# EAGLE board CT_schematic (EAGLE 7.6.0)

Size 100 x 80 mm. Coordinates in mm from the lower left corner, seen from the top.
Outline: 0,0 100,0 100,80 0,80 0,0
Copper layers (1*16): Top 0.035mm / dielectric 1.5mm / Bottom 0.035mm
Design rules "default": minimum track width 10mil, minimum drill 24mil, track to track 8mil, track to pad 8mil, pad to pad 8mil, via to via 8mil, smd to smd 8mil, copper to edge 40mil, drill to drill 8mil, minimum pad ring 10mil, minimum via ring 8mil, stop-mask expansion 4mil, vias tented up to drill 0mil, thermal gap 10mil

## Footprints (pad centres in the part's own frame; a part is rotated, then mirrored left to right if it is on the bottom)
C0603 = smd 0.8 x 0.8: 1 -0.762,0; 2 0.762,0
C0402 = smd 0.5 x 0.5: 1 -0.508,0; 2 0.508,0
C1210 = smd 1.2 x 2.5: 1 -1.524,0; 2 1.524,0
C0805 = smd 1.2 x 1.3: 1 -1.016,0; 2 1.016,0
R0603 = smd 0.8 x 0.8: 1 -0.762,0; 2 0.762,0
EXV-9H = smd 3.505 x 1.676: 1 -2.857,0; 2 2.857,0
L0603 = smd 0.8 x 0.8: 1 -0.762,0; 2 0.762,0
IND25X25CZ = smd 2.489 x 3.429: 1 -2.718,0; 2 2.718,0
PJ-037B_PACKAGE = drill 3.7 square: 1 12,0 | drill 3.2 square: 2 6,0
LQFP144 = smd 0.35 x 1.35: 1 -8.75,-10.625; 2 -8.25,-10.625; 3 -7.75,-10.625; 4 -7.25,-10.625; 5 -6.75,-10.625; 6 -6.25,-10.625; 7 -5.75,-10.625; 8 -5.25,-10.625; 9 -4.75,-10.625; 10 -4.25,-10.625; 11 -3.75,-10.625; 12 -3.25,-10.625; 13 -2.75,-10.62; 14 -2.25,-10.625; 15 -1.75,-10.625; 16 -1.25,-10.625; 17 -0.75,-10.625; 18 -0.25,-10.625; 19 0.25,-10.625; 20 0.75,-10.625; 21 1.25,-10.625; 22 1.75,-10.625; 23 2.25,-10.625; 24 2.75,-10.62; 25 3.25,-10.625; 26 3.75,-10.625; 27 4.25,-10.625; 28 4.75,-10.625; 29 5.25,-10.625; 30 5.75,-10.625; 31 6.25,-10.625; 32 6.75,-10.625; 33 7.25,-10.625; 34 7.75,-10.625; 35 8.25,-10.625; 36 8.75,-10.625; 73 8.75,10.625; 74 8.25,10.625; 75 7.75,10.625; 76 7.25,10.625; 77 6.75,10.625; 78 6.25,10.625; 79 5.75,10.625; 80 5.25,10.625; 81 4.75,10.625; 82 4.25,10.625; 83 3.75,10.625; 84 3.25,10.625; 85 2.75,10.625; 86 2.25,10.625; 87 1.75,10.625; 88 1.25,10.625; 89 0.75,10.625; 90 0.25,10.625; 91 -0.25,10.625; 92 -0.75,10.625; 93 -1.25,10.625; 94 -1.75,10.625; 95 -2.25,10.625; 96 -2.75,10.625; 97 -3.25,10.625; 98 -3.75,10.625; 99 -4.25,10.625; 100 -4.75,10.625; 101 -5.25,10.625; 102 -5.75,10.625; 103 -6.25,10.625; 104 -6.75,10.625; 105 -7.25,10.625; 106 -7.75,10.625; 107 -8.25,10.625; 108 -8.75,10.625 | smd 1.35 x 0.35: 37 10.625,-8.75; 38 10.625,-8.25; 39 10.625,-7.75; 40 10.625,-7.25; 41 10.625,-6.75; 42 10.625,-6.25; 43 10.625,-5.75; 44 10.625,-5.25; 45 10.625,-4.75; 46 10.625,-4.25; 47 10.625,-3.75; 48 10.625,-3.25; 49 10.625,-2.75; 50 10.625,-2.25; 51 10.625,-1.75; 52 10.625,-1.25; 53 10.625,-0.75; 54 10.625,-0.25; 55 10.625,0.25; 56 10.625,0.75; 57 10.625,1.25; 58 10.625,1.75; 59 10.625,2.25; 60 10.625,2.75; 61 10.625,3.25; 62 10.625,3.75; 63 10.625,4.25; 64 10.625,4.75; 65 10.625,5.25; 66 10.625,5.75; 67 10.625,6.25; 68 10.625,6.75; 69 10.625,7.25; 70 10.625,7.75; 71 10.625,8.25; 72 10.625,8.75; 109 -10.625,8.75; 110 -10.625,8.25; 111 -10.625,7.75; 112 -10.625,7.25; 113 -10.625,6.75; 114 -10.625,6.25; 115 -10.625,5.75; 116 -10.625,5.25; 117 -10.625,4.75; 118 -10.625,4.25; 119 -10.625,3.75; 120 -10.625,3.25; 121 -10.625,2.75; 122 -10.625,2.25; 123 -10.625,1.75; 124 -10.625,1.25; 125 -10.625,0.75; 126 -10.625,0.25; 127 -10.625,-0.25; 128 -10.625,-0.75; 129 -10.625,-1.25; 130 -10.625,-1.75; 131 -10.625,-2.25; 132 -10.625,-2.75; 133 -10.625,-3.25; 134 -10.625,-3.75; 135 -10.625,-4.25; 136 -10.625,-4.75; 137 -10.625,-5.25; 138 -10.625,-5.75; 139 -10.625,-6.25; 140 -10.625,-6.75; 141 -10.625,-7.25; 142 -10.625,-7.75; 143 -10.625,-8.25; 144 -10.625,-8.75
SOT-23-6 = smd 1.1 x 0.6: 1 -1.4,0.95; 2 -1.4,0; 3 -1.4,-0.95; 4 1.4,-0.95; 5 1.4,0; 6 1.4,0.95
AT24C02D = smd 1.6 x 0.6: 1 -2.475,1.905 | smd 1.55 x 0.6: 2 -2.475,0.635; 3 -2.475,-0.635; 4 -2.475,-1.905; 5 2.475,-1.905; 6 2.475,-0.635; 7 2.475,0.635; 8 2.475,1.905
TFBGA-153 = smd 0.3 x 0.3: A1 -3.25,3.25; A2 -2.75,3.25; A3 -2.25,3.25; A4 -1.75,3.25; A5 -1.25,3.25; A6 -0.75,3.25; A7 -0.25,3.25; A8 0.25,3.25; A9 0.75,3.25; A10 1.25,3.25; A11 1.75,3.25; A12 2.25,3.25; A13 2.75,3.25; A14 3.25,3.25; B1 -3.25,2.75; B2 -2.75,2.75; B3 -2.25,2.75; B4 -1.75,2.75; B5 -1.25,2.75; B6 -0.75,2.75; B7 -0.25,2.75; B8 0.25,2.75; B9 0.75,2.75; B10 1.25,2.75; B11 1.75,2.75; B12 2.25,2.75; B13 2.75,2.75; B14 3.25,2.75; C1 -3.25,2.25; C2 -2.75,2.25; C3 -2.25,2.25; C4 -1.75,2.25; C5 -1.25,2.25; C6 -0.75,2.25; C7 -0.25,2.25; C8 0.25,2.25; C9 0.75,2.25; C10 1.25,2.25; C11 1.75,2.25; C12 2.25,2.25; C13 2.75,2.25; C14 3.25,2.25; D1 -3.25,1.75; D2 -2.75,1.75; D3 -2.25,1.75; D4 -1.75,1.75; D12 2.25,1.75; D13 2.75,1.75; D14 3.25,1.75; E1 -3.25,1.25; E2 -2.75,1.25; E3 -2.25,1.25; E5 -1.25,1.25; E6 -0.75,1.25; E7 -0.25,1.25; E8 0.25,1.25; E9 0.75,1.25; E10 1.25,1.25; E12 2.25,1.25; E13 2.75,1.25; E14 3.25,1.25; F1 -3.25,0.75; F2 -2.75,0.75; F3 -2.25,0.75; F5 -1.25,0.75; F10 1.25,0.75; F12 2.25,0.75; F13 2.75,0.75; F14 3.25,0.75; G1 -3.25,0.25; G2 -2.75,0.25; G3 -2.25,0.25; G5 -1.25,0.25; G10 1.25,0.25; G12 2.25,0.25; G13 2.75,0.25; G14 3.25,0.25; H1 -3.25,-0.25; H2 -2.75,-0.25; H3 -2.25,-0.25; H5 -1.25,-0.25; H10 1.25,-0.25; H12 2.25,-0.25; H13 2.75,-0.25; H14 3.25,-0.25; J1 -3.25,-0.75; J2 -2.75,-0.75; J3 -2.25,-0.75; J5 -1.25,-0.75; J10 1.25,-0.75; J12 2.25,-0.75; J13 2.75,-0.75; J14 3.25,-0.75; K1 -3.25,-1.25; K2 -2.75,-1.25; K3 -2.25,-1.25; K5 -1.25,-1.25; K6 -0.75,-1.25; K7 -0.25,-1.25; K8 0.25,-1.25; K9 0.75,-1.25; K10 1.25,-1.25; K12 2.25,-1.25; K13 2.75,-1.25; K14 3.25,-1.25; L1 -3.25,-1.75; L2 -2.75,-1.75; L3 -2.25,-1.75; L12 2.25,-1.75; L13 2.75,-1.75; L14 3.25,-1.75; M1 -3.25,-2.25; M2 -2.75,-2.25; M3 -2.25,-2.25; M4 -1.75,-2.25; M5 -1.25,-2.25; M6 -0.75,-2.25; M7 -0.25,-2.25; M8 0.25,-2.25; M9 0.75,-2.25; M10 1.25,-2.25; M11 1.75,-2.25; M12 2.25,-2.25; M13 2.75,-2.25; M14 3.25,-2.25; N1 -3.25,-2.75; N2 -2.75,-2.75; N3 -2.25,-2.75; N4 -1.75,-2.75; N5 -1.25,-2.75; N6 -0.75,-2.75; N7 -0.25,-2.75; N8 0.25,-2.75; N9 0.75,-2.75; N10 1.25,-2.75; N11 1.75,-2.75; N12 2.25,-2.75; N13 2.75,-2.75; N14 3.25,-2.75; P1 -3.25,-3.25; P2 -2.75,-3.25; P3 -2.25,-3.25; P4 -1.75,-3.25; P5 -1.25,-3.25; P6 -0.75,-3.25; P7 -0.25,-3.25; P8 0.25,-3.25; P9 0.75,-3.25; P10 1.25,-3.25; P11 1.75,-3.25; P12 2.25,-3.25; P13 2.75,-3.25; P14 3.25,-3.25
RHB32_3P45X3P45 = smd 0.85 x 0.28: 1 -2.475,1.75; 2 -2.475,1.25; 3 -2.475,0.75; 4 -2.475,0.25; 5 -2.475,-0.25; 6 -2.475,-0.75; 7 -2.475,-1.25; 8 -2.475,-1.75; 17 2.475,-1.75; 18 2.475,-1.25; 19 2.475,-0.75; 20 2.475,-0.25; 21 2.475,0.25; 22 2.475,0.75; 23 2.475,1.25; 24 2.475,1.75 | smd 0.28 x 0.85: 9 -1.75,-2.475; 10 -1.25,-2.475; 11 -0.75,-2.475; 12 -0.25,-2.475; 13 0.25,-2.475; 14 0.75,-2.475; 15 1.25,-2.475; 16 1.75,-2.475; 25 1.75,2.475; 26 1.25,2.475; 27 0.75,2.475; 28 0.25,2.475; 29 -0.25,2.475; 30 -0.75,2.475; 31 -1.25,2.475; 32 -1.75,2.475 | smd 3.45 x 3.45: 33 0,0
MICRO_USB_AB = smd 0.4 x 1.35: 1 1.3,0.26; 2 0.65,0.26; 3 0,0.26; 4 -0.65,0.26; 5 -1.3,0.26 | drill 0.6 pad 0.95 long: 6 4.175,-2.54; 7 -4.175,-2.54 | drill 0.7 pad 1.1 long: 8 -2.225,0.46; 9 2.225,0.46
SOT143B = smd 1 x 0.7: 1 -0.75,-1 | smd 0.6 x 0.7: 2 0.95,-1; 3 0.95,1; 4 -0.95,1
USB-A-H = drill 0.914: 1 2.718,3.493; 2 2.718,1.003; 3 2.718,-1.003; 4 2.718,-3.493 | drill 2.311: 5 0,-6.566; 6 0,6.566
QFN-28 = smd 0.813 x 0.305: 1 -2.451,1.5; 2 -2.451,1; 3 -2.451,0.5; 4 -2.451,0; 5 -2.451,-0.5; 6 -2.451,-1; 7 -2.451,-1.5; 15 2.451,-1.5; 16 2.451,-1; 17 2.451,-0.5; 18 2.451,0; 19 2.451,0.5; 20 2.451,1; 21 2.451,1.5 | smd 0.305 x 0.813: 8 -1.5,-2.451; 9 -1,-2.451; 10 -0.5,-2.451; 11 0,-2.451; 12 0.5,-2.451; 13 1,-2.451; 14 1.5,-2.451; 22 1.5,2.451; 23 1,2.451; 24 0.5,2.451; 25 0,2.451; 26 -0.5,2.451; 27 -1,2.451; 28 -1.5,2.451 | smd 3.607 x 3.607: 29 0,0
SJ-43515TS-SMT-TR = smd 2.2 x 3: 1 0.6,-7.4; 4 3.4,-7.4 | smd 3 x 3: 2 12.8,-7.4; 5 17,-3 | smd 2 x 3: 3 5.3,0; 6 2.5,0 | drill 1.8: P$7 4.5,-3.69; P$8 11.54,-3.69
ABLS-12.288MHZ-B4-T = smd 5.6 x 2.8: 1 -3.81,0; 2 5.69,0
ASEK = smd 1.4 x 1: 1 -1.1,-0.8; 2 1.1,-0.8; 3 1.1,0.8; 4 -1.1,0.8
ASFL1 = smd 1.7 x 1.5: 1 -1.27,-1.1; 2 1.27,-1.1; 3 1.27,1.1; 4 -1.27,1.1
WSON-8 = smd 0.3 x 0.6: 1 -0.75,0; 2 0.05,0; 3 0.85,0; 4 1.65,0; 5 1.65,3.8; 6 0.85,3.8; 7 0.05,3.8; 8 -0.75,3.8 | smd 3 x 2.6: PAD 0.45,1.9
IR3899MTR1PBF = smd 0.25 x 0.75: 1 0,0; 2 0.5,0; 3 1,0; 4 1.5,0; 5 2,0; 6 2.5,0; 7 3,0 | smd 0.75 x 0.25: 8 3.425,0.78; 9 3.425,1.28; 10 3.425,1.78; 14 -0.425,1.78; 15 -0.425,1.28; 16 -0.425,0.78 | smd 0.3 x 1.95: 11 3.22,3.63 | smd 1.62 x 2.42: 12 1.786,3.8 | smd 1 x 1.95: 13 0.117,3.63 | smd 2.19 x 1.25: 17 1.51,1.26
SON-6 = smd 0.55 x 0.3: 1 -0.355,0.5 | smd 0.52 x 0.3: 2 -0.37,0; 3 -0.37,-0.5; 4 0.37,-0.5; 5 0.37,0; 6 0.37,0.5
SW_4-1437565-2 = smd 1.4 x 2.1: 1 -2.23,4.55; 2 -2.23,-4.55; 3 2.23,4.55; 4 2.23,-4.55
LGM67K-G1J2-24-Z = smd 0.8 x 1.4: A -2,0; C 0,0
NC7SZ125M5X = smd 1.3 x 0.7: 1 -1.3,0.95; 2 -1.3,0; 3 -1.3,-0.95; 4 1.3,-0.95; 5 1.3,0.95
DUMMY_PACKAGE_331 = drill 0.3: 1 0,-1; 2 1.5,-1; 3 3,-1

## Placement (x,y rotation side)
C1  1e-06  [C0603]  -88.9,85.09 0 top  (outside the outline)
C2  1e-07  [C0603]  -92.71,85.09 0 top  (outside the outline)
C3  1e-07  [C0603]  -15.24,90.17 0 top  (outside the outline)
C4  1e-07  [C0603]  -19.05,90.17 0 top  (outside the outline)
C5  1e-07  [C0603]  -22.86,90.17 0 top  (outside the outline)
C6  1e-07  [C0603]  -26.67,90.17 0 top  (outside the outline)
C7  1e-07  [C0603]  -30.48,90.17 0 top  (outside the outline)
C8  1e-07  [C0603]  -34.29,90.17 0 top  (outside the outline)
C9  1e-07  [C0603]  -38.1,90.17 0 top  (outside the outline)
C10  1e-07  [C0603]  -41.91,90.17 0 top  (outside the outline)
C11  1e-07  [C0603]  -45.72,90.17 0 top  (outside the outline)
C12  1e-07  [C0603]  -49.53,90.17 0 top  (outside the outline)
C13  1e-07  [C0603]  -53.34,90.17 0 top  (outside the outline)
C14  4.7e-06  [C0603]  -54.61,85.09 0 top  (outside the outline)
C15  2.2e-06  [C0603]  -58.42,85.09 0 top  (outside the outline)
C16  2.2e-06  [C0603]  -62.23,85.09 0 top  (outside the outline)
C17  1e-08  [C0603]  -57.15,90.17 0 top  (outside the outline)
C18  1e-06  [C0603]  -60.96,90.17 0 top  (outside the outline)
C19  1e-07  [C0603]  -64.77,90.17 0 top  (outside the outline)
C20  1e-08  [C0402]  -62.23,95.25 0 top  (outside the outline)
C21  1e-07  [C0402]  -66.04,95.25 0 top  (outside the outline)
C22  2.2e-06  [C0603]  -66.04,85.09 0 top  (outside the outline)
C23  2.2e-06  [C0603]  -69.85,85.09 0 top  (outside the outline)
C24  1e-07  [C0402]  -69.85,95.25 0 top  (outside the outline)
C25  1e-07  [C0402]  -73.66,95.25 0 top  (outside the outline)
C26  2.2e-06  [C0603]  -73.66,85.09 0 top  (outside the outline)
C27  1e-07  [C0402]  -77.47,95.25 0 top  (outside the outline)
C28  2.2e-06  [C0603]  -77.47,85.09 0 top  (outside the outline)
C29  1e-07  [C0402]  -81.28,95.25 0 top  (outside the outline)
C30  1e-07  [C0402]  -85.09,95.25 0 top  (outside the outline)
C31  2.2e-06  [C0603]  -81.28,85.09 0 top  (outside the outline)
C32  1e-06  [C0603]  -68.58,90.17 0 top  (outside the outline)
C33  2.2e-05  [C1210]  -73.66,60.96 0 top  (outside the outline)
C34  2.2e-05  [C1210]  -80.01,60.96 0 top  (outside the outline)
C35  1e-09  [C0402]  -88.9,95.25 0 top  (outside the outline)
C36  1e-09  [C0402]  -92.71,95.25 0 top  (outside the outline)
C37  1e-07  [C0402]  -15.24,100.33 0 top  (outside the outline)
C38  1e-07  [C0402]  -19.05,100.33 0 top  (outside the outline)
C39  1e-07  [C0402]  -22.86,100.33 0 top  (outside the outline)
C40  1e-07  [C0402]  -26.67,100.33 0 top  (outside the outline)
C41  1e-07  [C0402]  -30.48,100.33 0 top  (outside the outline)
C42  1e-05  [C0805]  -50.8,68.58 0 top  (outside the outline)
C43  1e-05  [C0805]  -55.88,68.58 0 top  (outside the outline)
C44  1e-05  [C0805]  -60.96,68.58 0 top  (outside the outline)
C45  1e-05  [C0805]  -66.04,68.58 0 top  (outside the outline)
C46  1e-05  [C0805]  -71.12,68.58 0 top  (outside the outline)
C47  2.2e-11  [C0402]  -54.61,95.25 0 top  (outside the outline)
C48  2.2e-11  [C0402]  -58.42,95.25 0 top  (outside the outline)
C49  1e-08  [C0402]  -34.29,100.33 0 top  (outside the outline)
C50  1e-08  [C0402]  -38.1,100.33 0 top  (outside the outline)
C51  1e-08  [C0402]  -41.91,100.33 0 top  (outside the outline)
C52  1e-08  [C0402]  -45.72,100.33 0 top  (outside the outline)
C53  1e-05  [C1210]  -86.36,60.96 0 top  (outside the outline)
C54  1e-05  [C0805]  -76.2,68.58 0 top  (outside the outline)
C55  8e-07  [R0603]  -72.39,90.17 0 top  (outside the outline)
C56  1e-05  [C1210]  -92.71,60.96 0 top  (outside the outline)
C57  0.0001  [C1210]  -16.51,69.85 0 top  (outside the outline)
C58  2.2e-06  [C0603]  -85.09,85.09 0 top  (outside the outline)
C59  1e-07  [C0402]  -49.53,100.33 0 top  (outside the outline)
C60  1e-07  [C0402]  -53.34,100.33 0 top  (outside the outline)
C61  6.9430689229727e-09  [R0603]  -86.36,68.58 0 top  (outside the outline)
C62  2.3669553146498e-07  [R0603]  -20.32,74.93 0 top  (outside the outline)
C65  1e-07  [C0402]  -57.15,100.33 0 top  (outside the outline)
C66  0.0001  [EXV-9H]  -73.66,52.07 0 top  (outside the outline)
C67  0.0001  [EXV-9H]  -85.09,52.07 0 top  (outside the outline)
C68  1e-08  [C0402]  -60.96,100.33 0 top  (outside the outline)
C69  1e-08  [C0402]  -64.77,100.33 0 top  (outside the outline)
C70  1e-08  [C0402]  -68.58,100.33 0 top  (outside the outline)
F1  240.0  [L0603]  -76.2,90.17 0 top  (outside the outline)
I1  6.8e-07  [IND25X25CZ]  -36.83,62.23 0 top  (outside the outline)
J1  PJ-037B  [PJ-037B_PACKAGE]  -55.88,30.48 0 top  (outside the outline)
R2  1000.0  [R0603]  -80.01,90.17 0 top  (outside the outline)
R4  4700.0  [R0603]  -83.82,90.17 0 top  (outside the outline)
R5  4700.0  [R0603]  -87.63,90.17 0 top  (outside the outline)
R6  4700.0  [R0603]  -91.44,90.17 0 top  (outside the outline)
R7  2200.0  [R0603]  -95.25,90.17 0 top  (outside the outline)
R8  2200.0  [R0603]  -15.24,95.25 0 top  (outside the outline)
R9  47000.0  [R0603]  -63.5,74.93 0 top  (outside the outline)
R10  10000.0  [R0603]  -68.58,74.93 0 top  (outside the outline)
R11  10000.0  [R0603]  -73.66,74.93 0 top  (outside the outline)
R12  10000.0  [R0603]  -78.74,74.93 0 top  (outside the outline)
R13  1270.0  [R0603]  -19.05,95.25 0 top  (outside the outline)
R14  10000.0  [R0603]  -83.82,74.93 0 top  (outside the outline)
R15  10000.0  [R0603]  -88.9,74.93 0 top  (outside the outline)
R16  10000.0  [R0603]  -93.98,74.93 0 top  (outside the outline)
R17  10000.0  [R0603]  -15.24,80.01 0 top  (outside the outline)
R18  10000.0  [R0603]  -20.32,80.01 0 top  (outside the outline)
R19  10000.0  [R0603]  -25.4,80.01 0 top  (outside the outline)
R20  34000.0  [R0603]  -30.48,80.01 0 top  (outside the outline)
R21  34000.0  [R0603]  -35.56,80.01 0 top  (outside the outline)
R22  34000.0  [R0603]  -40.64,80.01 0 top  (outside the outline)
R23  34000.0  [R0603]  -45.72,80.01 0 top  (outside the outline)
R24  34000.0  [R0603]  -50.8,80.01 0 top  (outside the outline)
R25  34000.0  [R0603]  -55.88,80.01 0 top  (outside the outline)
R26  34000.0  [R0603]  -60.96,80.01 0 top  (outside the outline)
R27  34000.0  [R0603]  -66.04,80.01 0 top  (outside the outline)
R28  34000.0  [R0603]  -71.12,80.01 0 top  (outside the outline)
R29  34000.0  [R0603]  -76.2,80.01 0 top  (outside the outline)
R30  47000.0  [R0603]  -81.28,80.01 0 top  (outside the outline)
R31  10000.0  [R0603]  -86.36,80.01 0 top  (outside the outline)
R32  10000.0  [R0603]  -91.44,80.01 0 top  (outside the outline)
R33  47000.0  [R0603]  -15.24,85.09 0 top  (outside the outline)
R34  47000.0  [R0603]  -20.32,85.09 0 top  (outside the outline)
R35  47000.0  [R0603]  -25.4,85.09 0 top  (outside the outline)
R36  680.0  [R0603]  -22.86,95.25 0 top  (outside the outline)
R37  100000.0  [R0603]  -38.1,74.93 0 top  (outside the outline)
R38  806.0  [R0603]  -26.67,95.25 0 top  (outside the outline)
R39  1000.0  [R0603]  -30.48,95.25 0 top  (outside the outline)
R40  100000.0  [R0603]  -43.18,74.93 0 top  (outside the outline)
R41  153694.38  [R0603]  -33.02,74.93 0 top  (outside the outline)
R42  100000.0  [R0603]  -48.26,74.93 0 top  (outside the outline)
R43  0.1  [R0603]  -34.29,95.25 0 top  (outside the outline)
R44  4030.2416170974  [R0603]  -27.94,74.93 0 top  (outside the outline)
R45  453.0  [R0603]  -38.1,95.25 0 top  (outside the outline)
R46  75.0  [R0603]  -41.91,95.25 0 top  (outside the outline)
R47  130.0  [R0603]  -45.72,95.25 0 top  (outside the outline)
R48  39000.0  [R0603]  -30.48,85.09 0 top  (outside the outline)
R49  49900.0  [R0603]  -35.56,85.09 0 top  (outside the outline)
R50  5760.0  [R0603]  -49.53,95.25 0 top  (outside the outline)
R51  10000.0  [R0603]  -40.64,85.09 0 top  (outside the outline)
R52  10000.0  [R0603]  -45.72,85.09 0 top  (outside the outline)
R53  82000.0  [R0603]  -50.8,85.09 0 top  (outside the outline)
R54  300000.0  [R0603]  -53.34,74.93 0 top  (outside the outline)
R55  120000.0  [R0603]  -58.42,74.93 0 top  (outside the outline)
U1  STM32F469ZGT6  [LQFP144]  -24.13,11.43 0 top  (outside the outline)
U2  MAX4995AAUT+T  [SOT-23-6]  -21.59,68.58 0 top  (outside the outline)
U3  AT24C02D-SSHM-T  [AT24C02D]  -40.64,43.18 0 top  (outside the outline)
U4  mtfc4gmcdm  [TFBGA-153]  -43.18,8.89 0 top  (outside the outline)
U5  TUSB1210BRHBR  [RHB32_3P45X3P45]  -44.45,62.23 0 top  (outside the outline)
U6  47590-0001  [MICRO_USB_AB]  -64.77,30.48 0 top  (outside the outline)
U7  prtr5v0u2ax  [SOT143B]  -81.28,100.33 0 top  (outside the outline)
U8  MAX4995AAUT+T  [SOT-23-6]  -26.67,68.58 0 top  (outside the outline)
U9  61400416021  [USB-A-H]  -57.15,8.89 0 top  (outside the outline)
U10  prtr5v0u2ax  [SOT143B]  -93.98,100.33 0 top  (outside the outline)
U11  WM8731CLSEFL  [QFN-28]  -66.04,60.96 0 top  (outside the outline)
U12  SJ-43515TS-SMT-TR  [SJ-43515TS-SMT-TR]  -93.98,10.16 0 top  (outside the outline)
U13  SJ-43515TS-SMT-TR  [SJ-43515TS-SMT-TR]  -39.37,33.02 0 top  (outside the outline)
U14  ABLS-12.288MHZ-B4-T  [ABLS-12.288MHZ-B4-T]  -25.4,62.23 0 top  (outside the outline)
U15  ASEK-32.768KHz-ECST  [ASEK]  -64.77,52.07 0 top  (outside the outline)
U16  ASFL1-19.2MHZ-NCS  [ASFL1]  -27.94,53.34 0 top  (outside the outline)
U17  ASFL1-25MHZ-NCS  [ASFL1]  -44.45,53.34 0 top  (outside the outline)
U18  LP3878SDX-ADJ/NOPB  [WSON-8]  -62.23,40.64 0 top  (outside the outline)
U19  LP2951ACSDX/NOPB  [WSON-8]  -80.01,40.64 0 top  (outside the outline)
U20  IR3899MTR1PBF  [IR3899MTR1PBF]  -25.4,40.64 0 top  (outside the outline)
U21  TPS3895ADRYR  [SON-6]  -20.32,104.14 0 top  (outside the outline)
U22  4-1437565-2  [SW_4-1437565-2]  -85.09,29.21 0 top  (outside the outline)
U23  Q65110A2395  [LGM67K-G1J2-24-Z]  -53.34,60.96 0 top  (outside the outline)
U24  nc7sz125m5x  [NC7SZ125M5X]  -31.75,68.58 0 top  (outside the outline)
U25  nc7sz125m5x  [NC7SZ125M5X]  -38.1,68.58 0 top  (outside the outline)
U26  nc7sz125m5x  [NC7SZ125M5X]  -44.45,68.58 0 top  (outside the outline)
U27  Dummy  [DUMMY_PACKAGE_331]  -17.78,105.41 0 top  (outside the outline)

## Library data of the parts
C1-C62 C65-C70 F1 I1 J1 R2 R4-R55 U1-U27 = circuit_tree

## Nets
CLK_CRYSTAL_U11_1: C47.1 U11.1 U14.1
CLK_CRYSTAL_U11_2: C48.1 U11.2 U14.2
CLK_U1_7: U1.7 U15.3
CLK_U1_18: U1.18 U17.3
CLK_U5_1: U5.1 U16.3
GND: C1.2 C2.2 C3.2 C4.2 C5.2 C6.2 C7.2 C8.2 C9.2 C10.2 C11.2 C12.2 C13.2 C14.2 C15.2 C16.2 C17.2 C18.2 C19.2 C20.2 C21.2 C22.2 C23.2 C24.2 C25.2 C26.2 C27.2 C28.2 C29.2 C30.2 C31.2 C32.2 C36.2 C37.2 C38.2 C39.2 C40.2 C41.2 C42.2 C43.2 C44.2 C45.2 C46.2 C47.2 C48.2 C49.2 C50.2 C51.2 C52.2 C53.2 C54.2 C55.2 C56.2 C58.2 C59.2 C60.2 C65.2 C66.2 C67.2 C68.2 C69.2 C70.2 J1.2 R2.2 R9.2 R13.2 R15.2 R16.2 R18.2 R19.2 R30.2 R32.2 R33.2 R34.2 R35.2 R39.2 R42.2 R43.1 R43.2 R45.2 R48.2 R50.2 R53.2 R55.2 U1.15 U1.26 U1.33 U1.55 U1.76 U1.84 U1.109 U1.122 U1.129 U2.2 U3.4 U4.C4 U4.E7 U4.G5 U4.H10 U4.K8 U4.N2 U4.N5 U4.P4 U4.P6 U5.33 U6.5 U6.6 U6.7 U6.8 U6.9 U7.1 U8.2 U9.4 U9.5 U9.6 U10.1 U11.4 U11.15 U11.19 U11.25 U11.26 U11.29 U12.1 U13.1 U15.2 U16.2 U17.2 U18.3 U18.PAD U19.3 U19.4 U19.PAD U20.4 U20.11 U20.17 U21.2 U23.C U24.1 U24.3 U25.1 U25.3 U26.1 U26.3 U27.1
NET_U1_20: R5.1 U1.20 U25.4
NET_U1_28: C17.1 C18.1 F1.1 U1.27 U1.28
NET_U1_43: R12.1 U1.43
NET_U1_65: C15.1 U1.65
NET_U1_81: U1.81
NET_U1_87: U1.87
NET_U1_104: R13.1 U1.104
NET_U1_108: C16.1 U1.108
NET_U1_135: R7.1 U1.135 U3.6
NET_U1_136: R8.1 U1.136 U3.5
NET_U1_137: R11.1 U1.137
NET_U1_141: U23.A
NET_U1_142: R10.1 U1.142
NET_U1_144: U22.3 U22.4
NET_U2_3: R9.1 U2.3
NET_U3_1: R17.1 U3.1
NET_U3_2: R18.1 U3.2
NET_U3_3: R19.1 U3.3
NET_U3_7: R16.1 U3.7
NET_U4_C2: C23.1 C24.1 U4.C2
NET_U4_K5: R4.1 U4.K5 U24.4
NET_U5_11: R31.1 U5.11
NET_U5_12: C31.1 U5.12
NET_U5_14: R32.1 U5.14
NET_U5_20: C28.1 U5.20
NET_U5_27: R6.1 U5.27 U26.4
NET_U6_1: C32.1 U5.22 U6.1 U7.4 U8.1
NET_U6_2: U5.19 U6.2 U7.3
NET_U6_3: U5.18 U6.3 U7.2
NET_U6_4: U5.23 U6.4
NET_U8_3: R30.1 U8.3
NET_U8_4: U5.17 U8.4
NET_U11_9: U11.9
NET_U11_20: C41.1 C46.1 U11.20
NET_U12_2: C34.1 R34.1 U12.2
NET_U12_5: C33.1 R33.1 U12.5
NET_U12_13: C33.2
NET_U12_14: C34.2
NET_U13_5: C35.1 C36.1 R35.1 R36.1 U13.5
NET_U13_21: R36.2
NET_U13_22: C35.2
NET_U18_1: C52.1 U18.1
NET_U18_6: R38.2 R39.1 U18.6
NET_U18_8: R37.1 U18.8
NET_U19_5: R40.1 U19.5
NET_U19_7: R41.2 R42.1 U19.7
NET_U20_1: C61.1 R44.1 R45.1 R46.1 R47.1 U20.1 U20.8
NET_U20_2: C60.1 U20.2
NET_U20_3: C61.2 C62.1 C62.2 U20.3
NET_U20_5: R48.1 U20.5
NET_U20_10: C58.1 U20.10
NET_U20_12: C57.1 I1.1 U20.12
NET_U20_13: U20.13
NET_U20_14: C57.2 U20.14
NET_U20_15: R49.1 R50.1 U20.15
NET_U20_ATNET_3: I1.2 R44.2
NET_U20_ATNET_4: C62.2 R46.2
NET_U20_ATNET_5: R47.2
NET_U21_1: R52.1 R53.1 U21.1
NET_U21_3: R54.2 R55.1 U21.3
NET_U21_4: R51.1 U21.4 U24.2 U25.2 U26.2
NET_U22_1: R2.1 U22.1 U22.2
PROC_ADC1_IN0: U1.29 U27.3
PROC_ADC1_IN2: U1.31 U27.2
PROC_GPIO_TO_U1_USB_FAULT: R14.1 U1.2 U2.6
PROC_GPIO_TO_U1_VBUS_EN: R15.1 U1.1 U2.4
PROC_I2S3_CK: U1.132 U11.7
PROC_I2S3_EXT_SD: U1.133 U11.10
PROC_I2S3_SD: U1.124 U11.8
PROC_I2S3_WS: U1.35 U11.9 U11.11
PROC_SDIO_CK: R29.1 U1.115 U4.M6
PROC_SDIO_CMD: R28.1 U1.118 U4.M5
PROC_SDIO_D0: R20.1 U1.100 U4.A3
PROC_SDIO_D1: R21.1 U1.101 U4.A4
PROC_SDIO_D2: R22.1 U1.113 U4.A5
PROC_SDIO_D3: R23.1 U1.114 U4.B2
PROC_SDIO_D4: R24.1 U1.138 U4.B3
PROC_SDIO_D5: R25.1 U1.139 U4.B4
PROC_SDIO_D6: R26.1 U1.98 U4.B5
PROC_SDIO_D7: R27.1 U1.99 U4.B6
PROC_USB_OTG_FS_DM: U1.105 U9.2 U10.3
PROC_USB_OTG_FS_DP: U1.106 U9.3 U10.2
PROC_USB_OTG_FS_VBUS: U1.103 U2.1 U9.1 U10.4
PROC_USB_OTG_HS_ULPI_CK: U1.36 U5.26
PROC_USB_OTG_HS_ULPI_D0: U1.32 U5.3
PROC_USB_OTG_HS_ULPI_D1: U1.41 U5.4
PROC_USB_OTG_HS_ULPI_D2: U1.42 U5.5
PROC_USB_OTG_HS_ULPI_D3: U1.63 U5.6
PROC_USB_OTG_HS_ULPI_D4: U1.64 U5.7
PROC_USB_OTG_HS_ULPI_D5: U1.67 U5.9
PROC_USB_OTG_HS_ULPI_D6: U1.68 U5.10
PROC_USB_OTG_HS_ULPI_D7: U1.134 U5.13
PROC_USB_OTG_HS_ULPI_DIR: U1.23 U5.31
PROC_USB_OTG_HS_ULPI_NXT: U1.24 U5.2
PROC_USB_OTG_HS_ULPI_STP: U1.21 U5.29
VCC_S1_15V2: C53.1 C55.1 C59.1 C66.1 C67.1 J1.1 R37.2 R49.2 U18.4 U19.8 U20.9
VCC_TIER1_1V8: C1.1 C2.1 C3.1 C4.1 C5.1 C6.1 C7.1 C8.1 C9.1 C10.1 C11.1 C12.1 C13.1 C14.1 C19.1 C20.1 C21.1 C22.1 C29.1 C30.1 C37.1 C38.1 C39.1 C40.1 C42.1 C43.1 C44.1 C45.1 C54.1 C65.1 C68.1 C69.1 C70.1 F1.2 R4.2 R5.2 R6.2 R7.2 R8.2 R10.2 R11.2 R12.2 R14.2 R17.2 R20.2 R21.2 R22.2 R23.2 R24.2 R25.2 R26.2 R27.2 R28.2 R29.2 R31.2 R38.1 R51.2 R52.2 R54.1 U1.5 U1.16 U1.25 U1.34 U1.46 U1.56 U1.66 U1.77 U1.80 U1.97 U1.110 U1.123 U1.130 U1.143 U3.8 U4.C6 U4.M4 U4.N4 U4.P3 U4.P5 U5.28 U5.30 U5.32 U11.3 U11.5 U11.12 U11.18 U18.5 U21.6 U24.5 U25.5 U26.5
VCC_TIER1_3V3: C25.1 C26.1 C27.1 C49.1 C50.1 C51.1 C56.1 R40.2 R41.1 U4.E6 U4.F5 U4.J10 U4.K9 U5.21 U15.4 U16.4 U17.4 U19.1
VCC_TIER1_5V0: I1.2 R44.2 U2.5 U8.5

## Tracks (layer width: path | path; a pad name or v marks a point on that pad's centre or on a via)
CLK_CRYSTAL_U11_1  (2 unrouted)
CLK_CRYSTAL_U11_2  (2 unrouted)
CLK_U1_7  (1 unrouted)
CLK_U1_18  (1 unrouted)
CLK_U5_1  (1 unrouted)
GND  (143 unrouted)
NET_U1_20  (2 unrouted)
NET_U1_28  (4 unrouted)
NET_U1_43  (1 unrouted)
NET_U1_65  (1 unrouted)
NET_U1_104  (1 unrouted)
NET_U1_108  (1 unrouted)
NET_U1_135  (2 unrouted)
NET_U1_136  (2 unrouted)
NET_U1_137  (1 unrouted)
NET_U1_142  (1 unrouted)
NET_U1_144  (1 unrouted)
NET_U2_3  (1 unrouted)
NET_U3_1  (1 unrouted)
NET_U3_2  (1 unrouted)
NET_U3_3  (1 unrouted)
NET_U3_7  (1 unrouted)
NET_U4_C2  (2 unrouted)
NET_U4_K5  (2 unrouted)
NET_U5_11  (1 unrouted)
NET_U5_12  (1 unrouted)
NET_U5_14  (1 unrouted)
NET_U5_20  (1 unrouted)
NET_U5_27  (2 unrouted)
NET_U6_1  (4 unrouted)
NET_U6_2  (2 unrouted)
NET_U6_3  (2 unrouted)
NET_U6_4  (1 unrouted)
NET_U8_3  (1 unrouted)
NET_U8_4  (1 unrouted)
NET_U11_20  (2 unrouted)
NET_U12_2  (2 unrouted)
NET_U12_5  (2 unrouted)
NET_U13_5  (4 unrouted)
NET_U18_1  (1 unrouted)
NET_U18_6  (2 unrouted)
NET_U18_8  (1 unrouted)
NET_U19_5  (1 unrouted)
NET_U19_7  (2 unrouted)
NET_U20_1  (6 unrouted)
NET_U20_2  (1 unrouted)
NET_U20_3  (3 unrouted)
NET_U20_5  (1 unrouted)
NET_U20_10  (1 unrouted)
NET_U20_12  (2 unrouted)
NET_U20_14  (1 unrouted)
NET_U20_15  (2 unrouted)
NET_U20_ATNET_3  (1 unrouted)
NET_U20_ATNET_4  (1 unrouted)
NET_U21_1  (2 unrouted)
NET_U21_3  (2 unrouted)
NET_U21_4  (4 unrouted)
NET_U22_1  (2 unrouted)
PROC_ADC1_IN0  (1 unrouted)
PROC_ADC1_IN2  (1 unrouted)
PROC_GPIO_TO_U1_USB_FAULT  (2 unrouted)
PROC_GPIO_TO_U1_VBUS_EN  (2 unrouted)
PROC_I2S3_CK  (1 unrouted)
PROC_I2S3_EXT_SD  (1 unrouted)
PROC_I2S3_SD  (1 unrouted)
PROC_I2S3_WS  (2 unrouted)
PROC_SDIO_CK  (2 unrouted)
PROC_SDIO_CMD  (2 unrouted)
PROC_SDIO_D0  (2 unrouted)
PROC_SDIO_D1  (2 unrouted)
PROC_SDIO_D2  (2 unrouted)
PROC_SDIO_D3  (2 unrouted)
PROC_SDIO_D4  (2 unrouted)
PROC_SDIO_D5  (2 unrouted)
PROC_SDIO_D6  (2 unrouted)
PROC_SDIO_D7  (2 unrouted)
PROC_USB_OTG_FS_DM  (2 unrouted)
PROC_USB_OTG_FS_DP  (2 unrouted)
PROC_USB_OTG_FS_VBUS  (3 unrouted)
PROC_USB_OTG_HS_ULPI_CK  (1 unrouted)
PROC_USB_OTG_HS_ULPI_D0  (1 unrouted)
PROC_USB_OTG_HS_ULPI_D1  (1 unrouted)
PROC_USB_OTG_HS_ULPI_D2  (1 unrouted)
PROC_USB_OTG_HS_ULPI_D3  (1 unrouted)
PROC_USB_OTG_HS_ULPI_D4  (1 unrouted)
PROC_USB_OTG_HS_ULPI_D5  (1 unrouted)
PROC_USB_OTG_HS_ULPI_D6  (1 unrouted)
PROC_USB_OTG_HS_ULPI_D7  (1 unrouted)
PROC_USB_OTG_HS_ULPI_DIR  (1 unrouted)
PROC_USB_OTG_HS_ULPI_NXT  (1 unrouted)
PROC_USB_OTG_HS_ULPI_STP  (1 unrouted)
VCC_S1_15V2  (10 unrouted)
VCC_TIER1_1V8  (90 unrouted)
VCC_TIER1_3V3  (17 unrouted)
VCC_TIER1_5V0  (3 unrouted)